# Altium PCB SATELLITE.PcbDoc
Units mil, origin at the board's own origin, x right, y up, seen from the top; angles counter-clockwise.
Board outline 1958.5 x 1958.5 mil, 2 copper layers (Top Layer, Bottom Layer), stack 6.8 mil thick; 39 components, 29 nets, 191 pads, 48 vias.
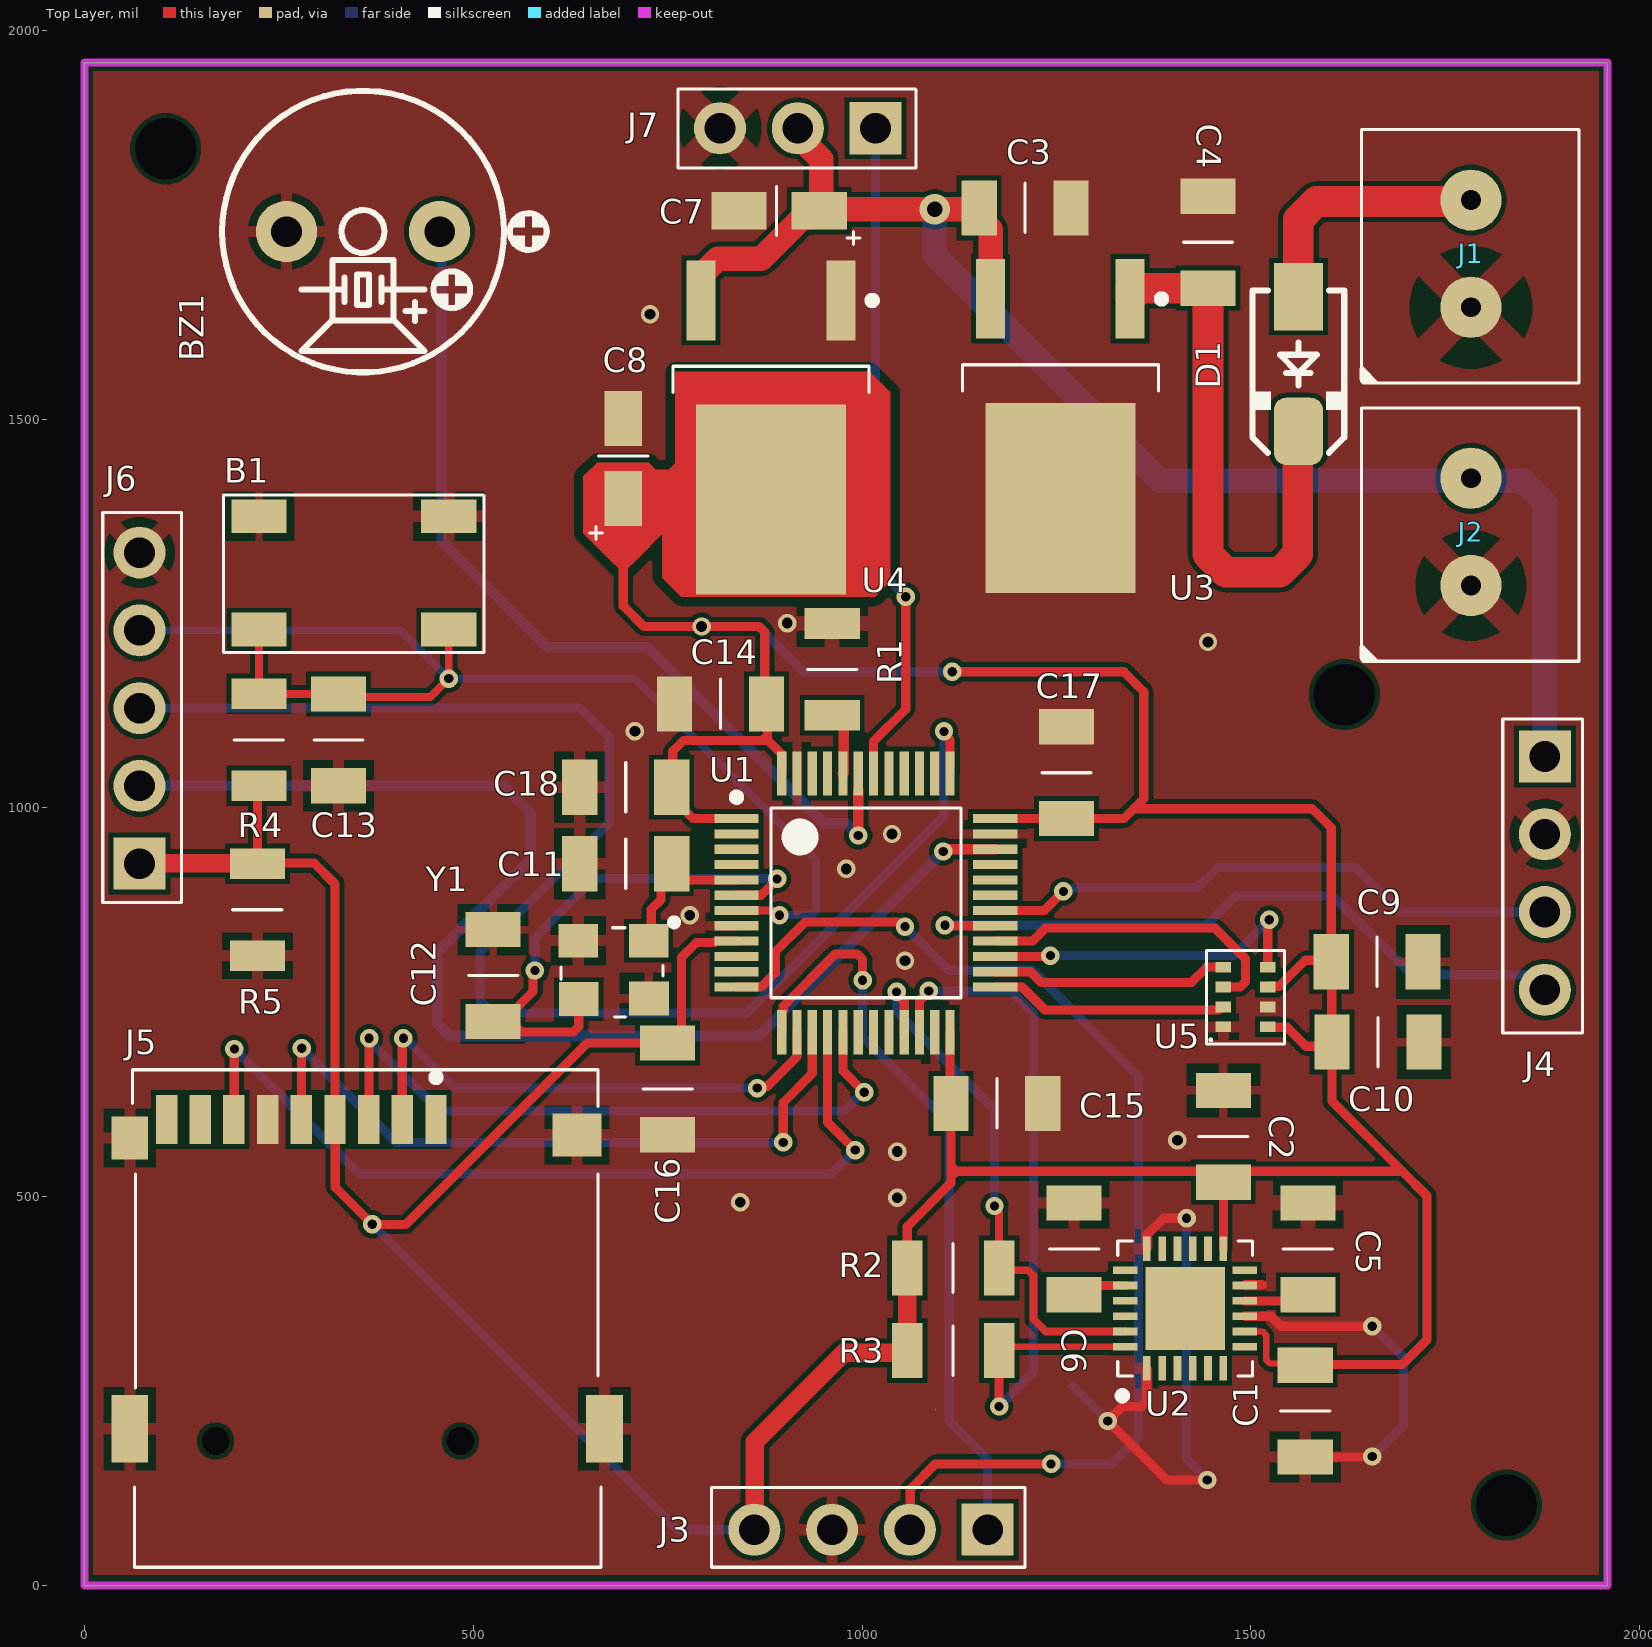
[diagram p0: Top Layer view]
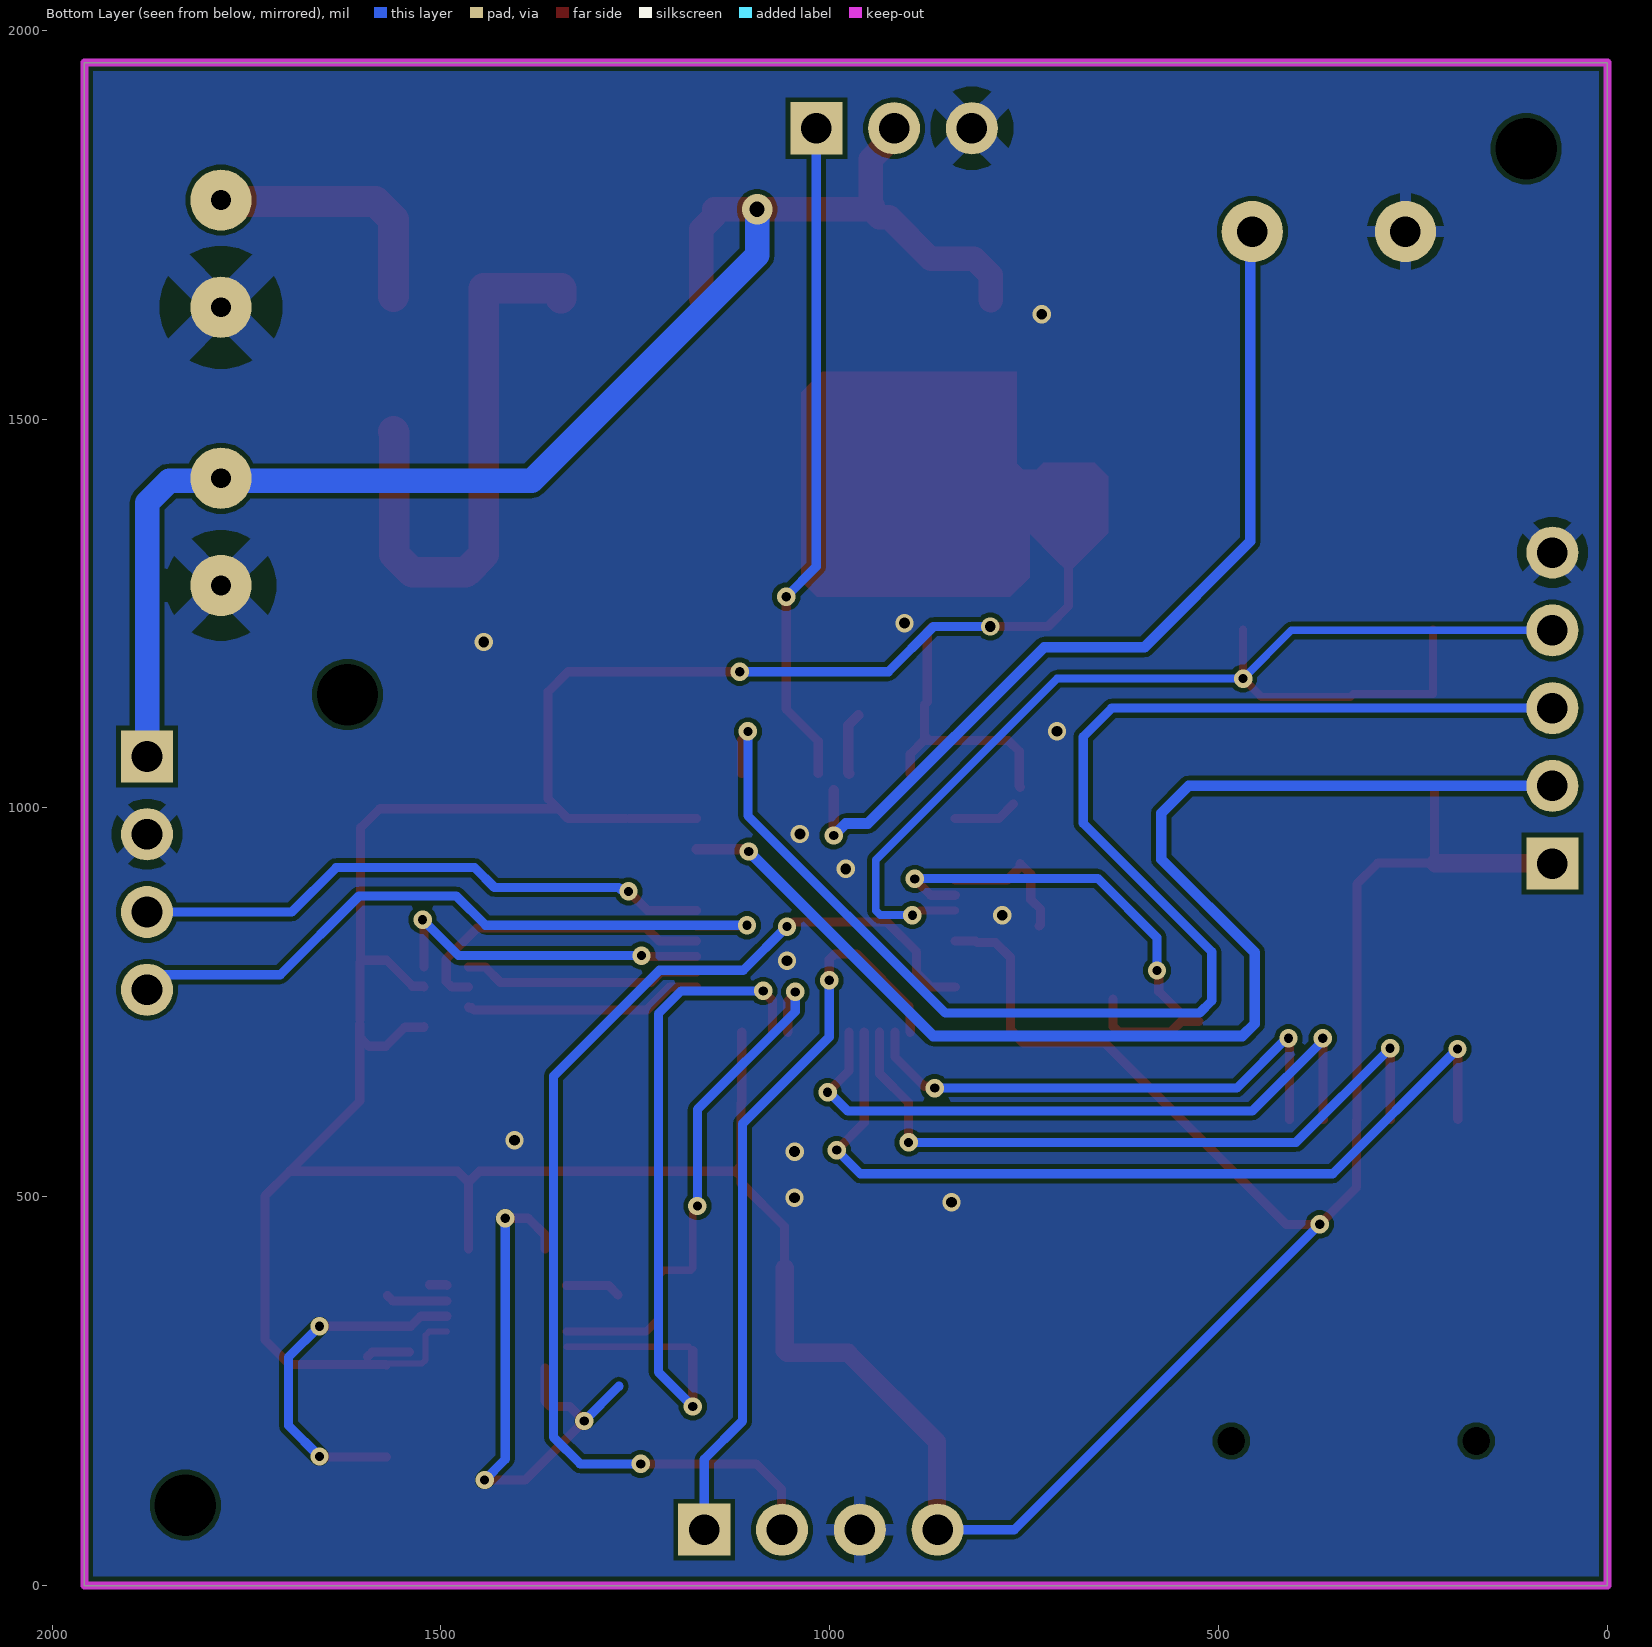
[diagram p1: Bottom Layer view, seen from below]
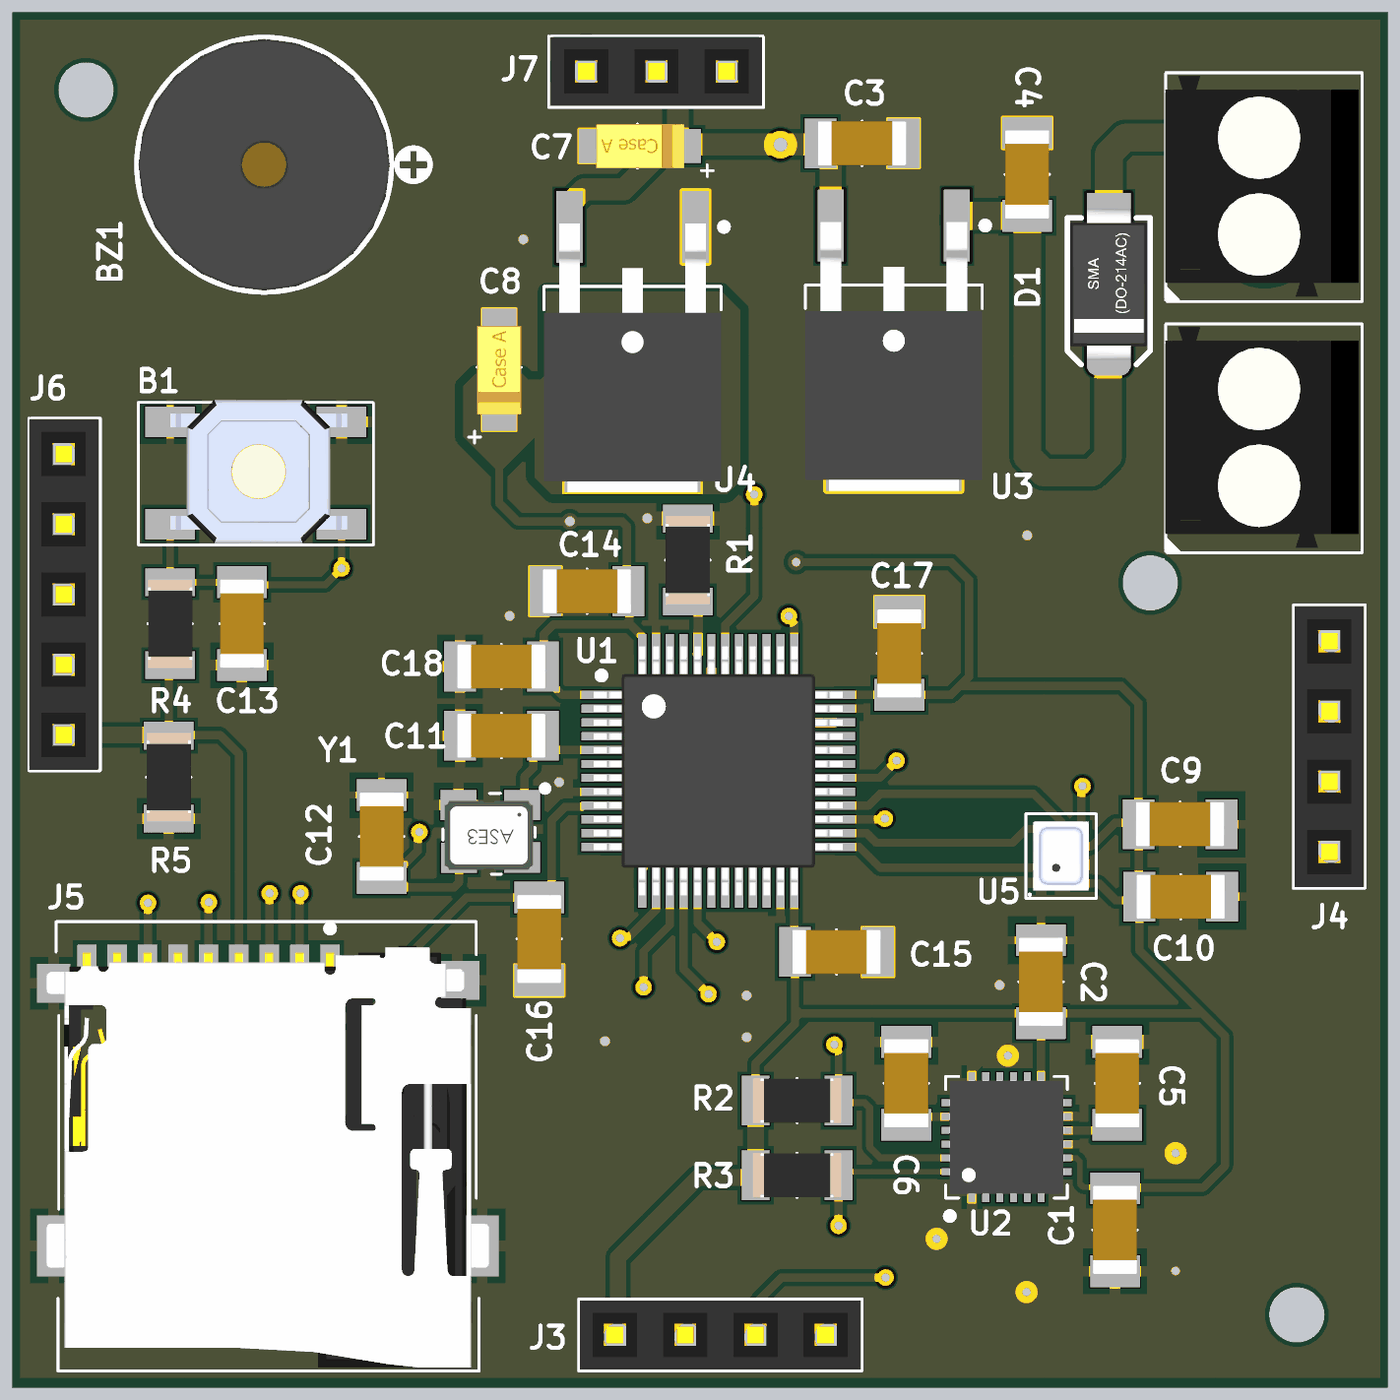
[diagram p2: 3D render of the assembled board from above, using the file's embedded part models]

## Layer stack, top to bottom
Top Solder: solder mask 0.4, Solder Resist, Dk 3.5
Top Layer: signal copper 1.4
Dielectric 1: core 4, Core-011, Dk 4.4
Bottom Layer: signal copper 1.4
Bottom Solder: solder mask 0.4, Solder Resist, Dk 3.5

## Board outline
0,0 0,1958.5 1958.5,1958.5 1958.5,0

## Design rules (kind name [scope] priority, off if disabled: settings)
Clearance Clearance_1 [InNamedPolygon('NONET_L01_P000')] p1: gap=10 ignorepadtopadclearanceinfootprint=TRUE except(0: Arc-Hole Track-Hole SMDPad-Hole THPad-Hole Via-Hole Fill-Hole Poly-Hole Region-Hole Text-Hole)
Clearance [All] p2: gap=11.81 ignorepadtopadclearanceinfootprint=TRUE except(0: Arc-Hole Track-Hole SMDPad-Hole THPad-Hole Via-Hole Fill-Hole Poly-Hole Region-Hole Text-Hole; 5.98: Arc-Track Arc-SMDPad Arc-Poly Track-Track Track-SMDPad Track-Poly SMDPad-SMDPad SMDPad-Poly THPad-Poly Via-Poly Fill-Poly Poly-Poly)
Clearance Clearance_2 [All] p3: gap=10 ignorepadtopadclearanceinfootprint=FALSE except(5.98: Arc-SMDPad Arc-THPad Arc-Via Track-SMDPad Track-THPad Track-Via SMDPad-SMDPad SMDPad-THPad SMDPad-Via THPad-THPad THPad-Via Via-Via)
HoleSize [All] p1: absolutevalues=TRUE maxlimit=122.05 minlimit=1 maxpercent=80.000 minpercent=20.000
MinimumSolderMaskSliver [All] p1: minsoldermaskwidth=3.94
PolygonConnect [All] p1: thpad.connectstyle=Relief thpad.reliefconductorwidth=15 thpad.reliefentries=4 thpad.polygonreliefangle="90 Angle" thpad.airgapwidth=10 smdpad.connectstyle=Relief smdpad.reliefconductorwidth=15 smdpad.reliefentries=4 smdpad.polygonreliefangle="90 Angle" smdpad.airgapwidth=10 via.connectstyle=Direct via.reliefconductorwidth=10 via.reliefentries=2 via.polygonreliefangle="90 Angle" via.airgapwidth=10
RoutingVias [All] p1: holewidth=11.81 width=23.62 viastyle="Through Hole" minholewidth=10 minwidth=19.68 maxholewidth=28 maxwidth=50
SilkToSolderMaskClearance [IsText] p1: minsilkscreentomaskgap=5.98 clearancetoexposedcopper=TRUE
SolderMaskExpansion [All] p1: expansion=4 istentingtop=FALSE
Width [All] p1: maxlimit=78.74 minlimit=5.98 preferedwidth=13.78 minimp=50.000000 maximp=50.000000 favimp=50.000000
27 further rules are at their usual default settings.

## Classes and differential pairs
component class SATELLITE: B1 BZ1 C1 C2 C3 C4 C5 C6 C7 C8 C9 C10 C11 C12 C13 C14 C15 C16 C17 C18 D1 J3 J4 J5 J6 J7 R1 R2 R3 R4 R5 U1 U2 U3 U4 U5 Y1

## Components (designator, comment, footprint, x,y, rotation, side; value= is the part's Value field where it differs from the comment)
B1 "Push Button" "PUSB BUTTON-SMD" 468.5,1229.33 r180 top
BZ1 "BUZZER" BZ_C9 358.27,1741.14 r180 top
C1 "0.1 uF C1206" C1206 1589.57,247.05 r270 top
C2 "0.1 uF C1206" C1206 1444.88,555.12 r90 top
C3 "0.1 uF C1206" C1206 1232.28,1751.97 r180 top
C4 "330 nF C1206" C1206 1425.2,1704.72 r90 top
C5 "0.1 uF C1206" C1206 1592.89,455.71 r270 top
C6 "2.2 nF c1206" C1206 1252.95,410.43 r90 top
C7 "10 uF - Tantal" "C1206- TANTAL" 889.76,1767.72 r180 top
C8 "10 uF - Tantal" "C1206- TANTAL" 692.91,1452.76 r90 top
C9 "0.1 uF C1206" C1206 1639.76,821.85 r0 top
C10 "0.1 uF C1206" C1206 1640.75,718.5 r0 top
C11 "16 pF" C1206 718.75,908.46 r180 top
C12 "16 pF" C1206 505.91,761.81 r90 top
C13 "0.1 uF C1206" C1206 346.46,1110.24 r270 top
C14 "0.1 uF C1206" C1206 795.28,1153.54 r0 top
C15 "0.1 uF C1206" C1206 1195.87,600.39 r180 top
C16 "0.1 uF C1206" C1206 730.31,616.04 r90 top
C17 "0.1 uF C1206" C1206 1282.48,1067.91 r270 top
C18 "0.1 uF C1206" C1206 673.47,1046.26 r0 top
D1 "1N4007" D_SMA 1561.02,1570.87 r270 top
J1 "Klemens 1x2 3.5mm" "KLEMENS 1X2 - 3.5MM" 1780.91,1706.77 r90 top
J2 "Klemens 1x2 3.5mm" "KLEMENS 1X2 - 3.5MM" 1780.91,1349.07 r90 top
J3 "Header 2.54 1x4" "HEADER 2.54 1X4" 1141.73,43.31 r180 top
J4 "Header 2.54 1x4" "HEADER 2.54 1X4" 1906.5,1046.46 r270 top
J5 "Micro SD Card Holder" "MICRO SD CARD HOLDER" 346.46,320.77 r0 top
J6 "Header 2.54 1x5" "HEADER 2.54 1X5" 70.87,928.35 r90 top
J7 "Header 2.54 1x3" "HEADER 2.54 1X3" 1017.32,1873.03 r180 top
R1 "10K R1206" "R1206 RESıSTOR" 961.61,1175.2 r90 top
R2 "4.7K R1206" "R1206 RESıSTOR" 1114.17,408.46 r0 top
R3 "4.7K R1206" "R1206 RESıSTOR" 1114.17,302.17 r0 top
R4 "10K R1206" "R1206 RESıSTOR" 224.41,1090.55 r270 top
R5 "10K R1206" "R1206 RESıSTOR" 222.38,866.14 r90 top
U1 "LQFP48-STM32" LQFP48-STM32 1004.92,877.95 r0 top
U2 "QFN24-MPU6050" QFN50P400X400X90_HS-25N_MPU6050_GYRO 1415.35,356.3 r90 top
U3 "L7805-DPAK" DPAK-L7805-LD108633 1254.92,1491.14 r270 top
U4 "LD108633 DPAK" DPAK-L7805-LD108633 882.87,1489.17 r270 top
U5 "BMP280" ? 1449.41,704.72 r270 top
Y1 "8 MHz 12.5 pf Osc" "8 MHZ OSC." 687.01,810.04 r180 top

## Footprints (in the part's own frame and the unit in brackets; to place one, negate y for a bottom-side part, rotate by r counter-clockwise, add the part's x,y. Pads: shape width x height; smd on the part's side, far side on the other; paste and mask are expansions set on the pad)
"8 MHZ OSC." [mm]
  rect 1.3x1.1 smd mask+0.05: 1(-0.981,-0.49) 2(1.319,-0.49) 3(1.303,1.417) 4(-0.986,1.401)
  silkscreen extent -1.91,-1.19 1.88,2.01, body extent -1.38,-0.64 1.82,1.86, height 1.22
BZ_C9 [mm] "BUZZER 9mm DIA, 7.62mm pitch"
  round 2 hole 1: 1(-2.5,0) 2(2.5,0)
  silkscreen extent -6,-4.6 4.6,4.6, body extent -4.55,-4.55 4.55,4.55, height 5.6
C1206 [mm]
  rect 1.15x1.8 smd mask+0.05: 1(-0.925,-0.5) 2(2.075,-0.5)
  silkscreen extent 0.58,-1.3 0.58,0.31, body extent -1.02,-1.3 2.18,0.3, height 1
"C1206- TANTAL" [mm]
  rect 1.8x1.23 smd mask+0.05: 1(-1.4,0) 1(-1.4,0) 2(1.22,0)
  silkscreen extent -2.74,-0.8 0,1.1, body extent -1.7,-0.8 1.5,0.8, height 1.62
D_SMA [mm] "SMA Molded Diode, 2-Leads, Body 4.3x2.7mm, SOD-128"
  rect 2.2x1.6 smd: 1(-2.2,0)
  rrect50% 2.2x1.6 smd: 2(2.2,0)
  silkscreen extent -2.4,-1.5 2.9,1.5, body extent -2.75,-1.4 2.75,1.4, height 2.6
DPAK-L7805-LD108633 [mm] "L7805 5V Regulator"
  rect 2.6x0.95 smd: 1(-4.15,2.28) 2(-4.15,-2.28)
  rect 6.2x4.9 smd: 3(2.35,0)
  silkscreen extent -4.27,-3.2 -1.15,3.43, body extent -4.27,-3.2 5.45,3.2, height 2.8
"HEADER 2.54 1X3" [mm]
  rect 1.7x1.7 hole 1 mask+0.05: 1(0,-0.025)
  round 1.7 hole 1 mask+0.05: 2(2.54,-0.025) 3(5.08,-0.025)
  silkscreen extent -1.33,-1.3 6.45,1.28, body extent -1.26,-1.27 6.36,1.23, height 9.1
"HEADER 2.54 1X4" [mm]
  rect 1.7x1.7 hole 1 mask+0.05: 1(-0.5,-0.725)
  round 1.7 hole 1 mask+0.05: 2(2.04,-0.725) 3(4.58,-0.725) 4(7.12,-0.725)
  silkscreen extent -1.73,-2.1 8.52,0.5, body extent -1.68,-2.05 8.48,0.45, height 9.1
"HEADER 2.54 1X5" [mm]
  rect 1.7x1.7 hole 1 mask+0.05: 1(0,0)
  round 1.7 hole 1 mask+0.05: 2(2.54,0) 3(5.08,0) 4(7.62,0) 5(10.16,0)
  silkscreen extent -1.28,-1.37 11.48,1.2, body extent -1.25,-1.3 11.45,1.2, height 9.1
"KLEMENS 1X2 - 3.5MM" [mm]
  round 2 hole 0.65: 1(-1.6,-0.05) 2(1.9,-0.05)
  silkscreen extent -4.11,-3.58 4.2,3.58, body extent -3.9,-3.45 4.09,3.55, height 8.9
LQFP48-STM32 [mm] "TSQFP, 48-Leads, Body 7.00x7.00mm, Pitch 0.50mm, IPC Medium Density"
  rect 1.45x0.3 smd mask+0.05: 1(-4.225,2.75) 2(-4.225,2.25) 3(-4.225,1.75) 4(-4.225,1.25) 5(-4.225,0.75) 6(-4.225,0.25) 7(-4.225,-0.25) 8(-4.225,-0.75) 9(-4.225,-1.25) 10(-4.225,-1.75) 11(-4.225,-2.25) 12(-4.225,-2.75) 25(4.225,-2.75) 26(4.225,-2.25) 27(4.225,-1.75) 28(4.225,-1.25) 29(4.225,-0.75) 30(4.225,-0.25) 31(4.225,0.25) 32(4.225,0.75) 33(4.225,1.25) 34(4.225,1.75) 35(4.225,2.25) 36(4.225,2.75)
  rect 0.3x1.45 smd mask+0.05: 13(-2.75,-4.225) 14(-2.25,-4.225) 15(-1.75,-4.225) 16(-1.25,-4.225) 17(-0.75,-4.225) 18(-0.25,-4.225) 19(0.25,-4.225) 20(0.75,-4.225) 21(1.25,-4.225) 22(1.75,-4.225) 23(2.25,-4.225) 24(2.75,-4.225) 37(2.75,4.225) 38(2.25,4.225) 39(1.75,4.225) 40(1.25,4.225) 41(0.75,4.225) 42(0.25,4.225) 43(-0.25,4.225) 44(-0.75,4.225) 45(-1.25,4.225) 46(-1.75,4.225) 47(-2.25,4.225) 48(-2.75,4.225)
  silkscreen extent -4.35,-3.1 3.1,3.57, body extent -4.5,-4.5 4.5,4.5, height 1.6
"MICRO SD CARD HOLDER" [mm]
  rect 0.7x1.6 smd paste+0 mask+0: 1(2.684,7.075) 2(1.584,7.075) 3(0.484,7.075) 4(-0.616,7.075) 5(-1.716,7.075) 6(-2.816,7.075) 7(-3.916,7.075) 8(-5.016,7.075) Cd(-6.116,7.075)
  rect 1.2x1.4 smd paste+0 mask+0: 10(-7.316,6.475)
  rect 1.6x1.4 smd paste+0 mask+0: 11(7.284,6.575)
  rect 1.2x2.2 smd paste+0 mask+0: 12(-7.316,-3.025) 13(8.184,-3.025)
  round 0 hole 0.9 unplated paste-1000 mask+0: ""(-4.516,-3.425) ""(3.484,-3.425)
  silkscreen extent -7.22,-7.55 8.08,8.7, body extent -7.57,-7.42 8.43,7.83, height 1.85
"PUSB BUTTON-SMD" [mm]
  rect 1.8x1.1 smd mask+0.05: 1(0,0) 2(6.2,0) 3(0,-3.7) 4(6.2,-3.7)
  silkscreen extent -1.15,-4.4 7.35,0.75, body extent -0.2,-4.5 6.2,0.7, height 1.5
QFN50P400X400X90_HS-25N_MPU6050_GYRO [mm] "QFN, 24-Leads, Body 4.00x4.00mm, Pitch 0.50mm, Thermal Pad 2.70x2.60mm, IPC Medium Density"
  rect 0.8x0.25 smd mask+0.05: 1(-1.95,1.25) 2(-1.95,0.75) 3(-1.95,0.25) 4(-1.95,-0.25) 5(-1.95,-0.75) 6(-1.95,-1.25) 13(1.95,-1.25) 14(1.95,-0.75) 15(1.95,-0.25) 16(1.95,0.25) 17(1.95,0.75) 18(1.95,1.25)
  rect 0.25x0.8 smd mask+0.05: 7(-1.25,-1.95) 8(-0.75,-1.95) 9(-0.25,-1.95) 10(0.25,-1.95) 11(0.75,-1.95) 12(1.25,-1.95) 19(1.25,1.95) 20(0.75,1.95) 21(0.25,1.95) 22(-0.25,1.95) 23(-0.75,1.95) 24(-1.25,1.95)
  rect 2.7x2.6 smd mask+0.05: 25(0,0)
  silkscreen extent -2.97,-2.2 2.2,2.2, body extent -2.07,-2.07 2.07,2.07, height 0.9
"R1206 RESıSTOR" [mm]
  rect 1x1.8 smd mask+0.05: 1(-1.425,0) 2(1.575,0)
  silkscreen extent 0.08,-0.8 0.08,0.81, body extent -1.52,-0.8 1.68,0.81, height 0.55
? [mm]
  rect 0.35x0.5 smd mask+0.05: 1(-0.35,0.385) 1(-0.35,0.385) 1(-0.35,0.385) 1(-0.35,0.385) 1(-0.35,0.385) 1(-0.35,0.385) 2(-1,0.385) 3(-1.65,0.385) 4(-2.3,0.385) 5(-2.3,1.835) 6(-1.65,1.835) 7(-1,1.835) 8(-0.35,1.835) 8(-0.35,1.835)
  silkscreen extent -2.85,-0.16 0.21,2.38, body extent -2.57,0.11 -0.07,2.11, height 0.95

## Part data
B1: "Smd Push Button", Satın Alma Linki=https://urun.n11.com/diger/mini-pushbutton-switch-smd-P227461537?gclid=Cj0KCQjwkoDmBRCcARIsAG3xzl8Y_-jeD7HocNM6lvuZ_rVp83568XPGtNzlPwXWLph8oCRqo0yh87UaApZYEALw_wcB&gclsrc=aw.ds
BZ1: library part BUZZER_C9, "Buzzer, 9mm, Magnetic Transducer", MANF=Mallory, MANF_P#=PB-09N23P-03Q, PARAM=2.7KHz, PARAM2="3V, 30mA", PRICE=$3
D1: library part DIODE_SMD_1N4007, "DIODE, GENERAL PURPOSE, 1000V/1A", ASSEMBLY=ASSEMBLY, DESC=DESCRIPTION, MANF=Kingtronics, MANF_P#=M7, PARAM="1000V VRRM", PARAM2=1A, PRICE=PRICE
U1: "STM32f101 48 Pins MICROCONTROLLER"
U2: "MPU6050_GYRO"
U3: "L7805 5V REGULATOR SMD Pack_3 Pins"
U4: "SMD,LD108633 DPAK 3.3V REGULATOR"
U5: "Pressure Sensor"

## Free pads (board coordinates)
  round 60 hole 78.74 unplated: ""(104.57,1847.65) ""(1620.08,1145.67) ""(1828.74,103.35)

## Via types
v1: diameter 23.62, hole 11.81, Top Layer to Bottom Layer, 31 vias
v2: diameter 23.62, hole 13.78, Top Layer to Bottom Layer, tented top, 13 vias
v3: diameter 23.62, hole 11.81, Top Layer to Bottom Layer, tented top, 2 vias
v4: diameter 39.37, hole 19.68, Top Layer to Bottom Layer, 1 vias
v5: diameter 23.62/23.62 (per signal layer), hole 11.81, Top Layer to Bottom Layer, 1 vias

## Nets (pads, with @x,y where several pads share a name; then routed paths per layer and width w, separated by ;. In a path a pad name is that pad's centre, name@x,y a point inside that pad or via, vN(x,y) a via of type N, cw(c..) or ccw(c..) an arc to the next point about the centre after c; other vN are vias at no path point)
3V3: C1.1 C2.1 C8.1 C9.1 C10.1 C14.2 C15.2 C16.2 C17.2 C18.2 J3.4 J5.4 J6.1 R2.1 R3.1 R4.2 R5.2 U1.1 U1.9 U1.24 U1.36 U1.48 U2.8 U2.13 U4.3 U5.6 U5.8 | length 6845
  Top Layer w8: U2.8 1515.08,326.77 1519.76,322.09 1519.76,290.12 1524.45,285.43 1567.91,285.43 C1.1
  Top Layer w11.81: J6.1 J6.1@71.51,928.99 ; R5.2@221.54,928.99 R5.2 R5.2@222.57,928.34 ; R4.2 222.57,1026.7 R5.2@222.57,928.34 ; J5.4 322.54,598.98 322.54,512.15 v1@370.08,464.61 ; J5.4@322.23,599.34 322.23,902.23 295.47,928.99 223.22,928.99 R5.2@222.57,928.34 ; v1(370.08,464.57) 370.23,464.42 413.24,464.42 646.55,697.73 C16.2 750.91,697.73 767.64,714.47 767.64,807.57 786.91,826.85 810.6,826.85 812.49,828.74 U1.9 ; C8.1@693.9,1396.65 692.91,1397.64 692.91,1259.84 719.49,1233.27 v2(793.65,1233.27) 867.82,1233.27 874.74,1226.35 874.74,1136.09 878.2,1132.63 878.2,1087.63 ; C18.2 756.47,1027.88 756.47,1072.81 770.2,1086.54 877.1,1086.54 878.2,1087.63 ; C18.2@763.78,1005.17 782.73,986.22 812.49,986.22 U1.1 ; J3.4 J3.4@862.2,72.64 ; U4.3 U4.3@885.83,1399.61 ; U1.48 896.65,1069.17 878.2,1087.63 ; R2.1 1058.07,461.61 1114.17,517.72 1114.17,539.71 ; U1.24 1113.19,621.06 C15.2 1114.17,539.71 ; v3(1115.87,1175.2) 1336.61,1175.2 1362.2,1149.61 1362.2,1011.81 1349.41,999.02 ; U1.36 C17.2@1257.4,986.22 ; C17.2 1336.61,986.22 1349.41,999.02 ; U2.13 C2.1 ; U5.8@1521.65,718.5 1522.15,718.01 1546.45,718.01 1570.9,693.57 1592.89,693.57 C10.1@1601.24,701.91 ; U5.6 1522.64,770.67 1536.42,770.67 1569.91,804.16 1601.35,804.16 C9.1 ; C1.1@1540.35,300.2 1588.58,300.2 C1.1@1594.49,294.29 ; C1.1 1570.87,284.45 1694.88,284.45 1726.38,315.94 1726.38,500.98 1694.57,532.79 ; C10.1@1603.99,727.36 1603.99,801.52 C9.1 ; C10.1@1604.33,721.71 C10.1 1604.33,623.03 1694.57,532.79 ; 1114.17,539.71 1121.09,532.79 1450.48,532.79 C2.1 ; 1349.41,999.02 1578.74,999.02 1603.35,974.41 C9.1 ; C2.1 1478.66,532.79 1694.57,532.79
  Top Layer w23.62: J6.1@71.51,928.99 R5.2@221.54,928.99 ; J3.4@862.2,72.64 862.2,185.04 976.38,299.21 1055.12,299.21 R3.1 R2.1
  Bottom Layer w11.81: v1(370.08,464.57) 762.8,71.85 J3.4 ; v2(793.65,1233.27) 866.6,1233.27 924.68,1175.2 v3(1115.87,1175.2)
5V: C3.2 C7.1 J2.2 J4.1 J7.2 U3.2 U4.2 | length 1963.6
  Top Layer w31.5: U4.2 793.11,1685.04 814.17,1706.1 870.5,1706.1 923.65,1759.25 936.42,1759.25 944.88,1767.72 944.88,1773.71 947.35,1776.18 947.35,1834.4 917.32,1864.43 J7.2 ; C7.1@946.85,1769.68 1088.58,1769.68 1148.62,1769.68 1148.62,1760.83 1165.16,1744.29 U3.2
  Bottom Layer w31.5: v4(1093.5,1769.68) 1093.5,1710.63 1383.47,1420.67 1782.87,1420.67 1849.66,1420.67 1877.95,1392.38 J4.1
9V: C4.1 D1.2 U3.1 | length 747.3
  Top Layer w39.37: U3.1@1345.67,1655.51 1345.67,1668.31 C4.1 1444.88,1325.98 1467.94,1302.92 1536.98,1302.92 1560.04,1325.98 1560.04,1483.27 D1.2
GND: B1.3 B1.4 BZ1.2 C1.2 C2.2 C3.1 C4.2 C5.1 C6.2 C7.2 C8.2 C9.2 C10.2 C11.2 C12.2 C13.2 C14.1 C15.1 C16.1 C17.1 C18.1 J1.1 J2.1 J3.3 J4.2 J5.6 J5.10 J5.11 J5.12 J5.13 J6.5 J7.3 R1.2 R5.1 U1.8 U1.23 U1.35 U1.47 U2.1 U2.9 U2.11 U2.18 U3.3 U4.1 U5.1 U5.7 Y1.2 Y1.4 | length 1230.8
  Top Layer w11.81: U2.1 1366.14,237.21 1359.22,230.29 1334.52,230.29 v1(1315.84,211.61) 1391.63,135.83 v5(1443.9,135.83) ; U2.18 1366.14,450.87 1387.71,472.44 v1(1417.32,472.44) ; U2.9 1525.88,346.46 1538.75,333.58 v1(1656.12,333.58) ; U2.11 1493.11,386.81 1514.6,386.81 ; C1.2 1655.51,165.35 v3(1656.12,165.97)
  Bottom Layer w11.81: 1271.21,256.25 v1(1315.84,211.61) ; v1(1417.32,472.44) 1417.32,162.4 v5(1443.9,135.83) ; v3(1656.12,165.97) 1696.15,205.99 1696.15,293.56 v1(1656.12,333.58)
  other v2: 843.5,493.11 1045.35,498.73 1045.28,558.07 1405.51,572.83 1055.12,803.46 778.34,861.92 979.61,921.57 1038.43,966.54 707.89,1098.66 1444.88,1213.3 903.93,1237.7 727.36,1634.84
NetB1_1: B1.1 B1.2 C13.1 J6.4 R4.1 U1.7 | length 1565.8
  Top Layer w10: B1.2 R4.1 C13.1 330.71,1142.72 444.88,1142.72 v1(468.5,1166.34) B1.1 ; U1.7 884.11,868.11 890.11,862.11 v1(893.79,862.11)
  Bottom Layer w10: J6.4 406.5,1228.35 v1(468.5,1166.34) 707.68,1166.34 940.94,933.07 940.94,868.13 935.09,862.28 893.96,862.28 v1(893.79,862.11)
NetBZ1_1: BZ1.1 U1.43 | length 1149.9
  Top Layer w13.78: v1(995.04,964.53) U1.43@995.06,1022.64
  Bottom Layer w13.78: BZ1.1 459.34,1738.49 459.34,1342.82 595.47,1206.69 724.41,1206.69 951.14,979.97 979.61,979.97 v1(995.04,964.53)
NetC5_2: C5.2 U2.10 | length 79.6
  Top Layer w11.81: U2.10 1561.98,366.14 C5.2@1568.9,373.06
NetC6_1: C6.1 U2.20 | length 70.8
  Top Layer w11.81: C6.1 1284.45,385.83 U2.20
NetC11_1: C11.1 U1.5 Y1.1 | length 185.9
  Top Layer w11.81: Y1.1@730.56,848.02 728.94,849.64 728.94,869.51 741.62,882.19 741.62,914.6 C11.1 755.17,924.21 771.9,907.48 U1.5
NetC12_1: C12.1 U1.6 Y1.3 | length 683
  Top Layer w11.81: C12.1 C12.1@538.39,725.39 ; v1(579.29,790.9) 577.03,788.64 577.03,764.04 C12.1@538.39,725.39 ; Y1.3 635.7,718.91 628.78,711.99 561.63,711.99 548.23,725.39 C12.1@538.39,725.39 ; U1.6 870.16,887.8 890.75,908.38 v1(890.75,908.76)
  Bottom Layer w11.81: v1(579.29,790.9) 579.29,833.22 655.51,909.45 890.06,909.45 v1(890.75,908.76)
NetD1_1: D1.1 J1.2 | length 330.6
  Top Layer w39.37: D1.1 1561.02,1756.66 1584.09,1779.72 J1.2@1782.87,1779.72
NetJ3_1: J3.1 U1.13 | length 967
  Top Layer w11.81: U1.13 896.65,737.71 898.54,739.6 898.54,745.08 965.64,812.18 993.75,812.18 1000.67,805.26 v1(1000.67,778.3)
  Bottom Layer w11.81: v1(1000.67,778.3) 1000.67,705.46 1112.2,593.92 1112.2,211.61 1161.42,162.4 J3.1
NetJ3_2: J3.2 U1.12 | length 1486.9
  Top Layer w11.81: U1.12 870.16,769.68 888.38,787.91 888.38,814.94 926.79,853.35 1046.02,853.35 1051.92,847.44 v1(1055.12,847.44) ; J3.2 1062.01,72.44 1062.01,124.02 1094.49,156.5 v1(1243.11,156.5)
  Bottom Layer w11.81: v1(1055.12,847.44) 1111.22,791.34 1219.07,791.34 1355.32,655.09 1355.32,190.94 1320.87,156.5 v1(1243.11,156.5)
NetJ4_3: J4.3 U1.30 | length 753.2
  Top Layer w11.81: U1.30 1234.25,868.11 v1(1258.86,892.72)
  Bottom Layer w11.81: v1(1258.86,892.72) 1261.12,894.98 1269.02,894.98 1271.68,897.64 1431.1,897.64 1456.69,923.23 1634.84,923.23 1691.93,866.14 J4.3
NetJ4_4: J4.4 U1.29 | length 902
  Top Layer w11.81: v1(1106.55,849.1) 1107.22,848.43 U1.29
  Bottom Layer w11.81: v1(1106.55,849.1) 1442.6,849.1 1480.32,886.81 1605.32,886.81 1706.69,785.43 1858.66,785.43 J4.4
NetJ5_2: J5.2 U1.14 | length 689.7
  Top Layer w11.81: J5.2 408.82,702.42 v1(410.14,703.74) v1@410.14,706.4 ; v1(865.16,639.76) 867.42,642.02 878.33,642.02 916.34,680.04 U1.14
  Bottom Layer w11.81: v1@410.14,706.4 476.78,639.76 v1(865.16,639.76)
NetJ5_3: J5.3 U1.17 | length 874.5
  Top Layer w11.81: J5.3 365.83,599.64 365.83,700.47 v1@366.14,700.79 ; U1.17 975.39,661.85 v1(1002.82,634.42)
  Bottom Layer w11.81: v1@366.14,700.79 456.69,610.24 976.89,610.24 1001.08,634.42 v1(1002.82,634.42)
  other v1: 366.14,703.74
NetJ5_5: J5.5 U1.15 | length 921.3
  Top Layer w11.81: J5.5 279.21,599.64 279.21,690.63 v1(279.53,690.94) ; v1@901.57,569.88 v1(898.62,569.88) 898.62,621.06 936.02,658.46 U1.15
  Bottom Layer w11.81: v1(279.53,690.94) 400.59,569.88 v1(898.62,569.88)
NetJ5_7: J5.7 U1.16 | length 1134.5
  Top Layer w11.81: J5.7 192.6,599.64 192.6,689.65 v1(192.91,689.96) ; U1.16 955.71,595.47 v1(991.14,560.04)
  Bottom Layer w11.81: v1(192.91,689.96) 353.35,529.53 960.63,529.53 v1(991.14,560.04)
NetJ6_2: J6.2 U1.34 | length 1661.5
  Top Layer w13.78: v1(1104.33,943.9) 1106.99,943.9 1109.95,946.85 U1.34
  Bottom Layer w13.78: J6.2 538.58,1028.35 573.82,993.11 573.82,934.06 453.74,813.98 453.74,722.44 469.49,706.69 867.13,706.69 v1(1104.33,943.9)
NetJ6_3: J6.3 U1.37 | length 1900.5
  Top Layer w11.81: v1(1105.32,1098.43) 1105.32,1095.23 1113.19,1087.36 U1.37
  Bottom Layer w11.81: J6.3 637.4,1128.35 674.21,1091.54 674.21,980.32 508.86,814.96 508.86,752 524.64,736.22 851.42,736.22 1105.32,990.12 v1(1105.32,1098.43)
NetJ7_1: J7.1 U1.42 | length 862.9
  Top Layer w11.81: U1.42 1014.76,1085.63 1056.1,1126.97 v1(1056.1,1271.65)
  Bottom Layer w11.81: J7.1 1017.32,1310.43 v1(1056.1,1271.65)
NetR1_1: R1.1 U1.44 | length 80.5
  Top Layer w13.78: R1.1@963.58,1119.09 976.38,1106.3 976.38,1078.25 976.3,1078.17 976.3,1045.2 U1.44
NetR2_2: R2.2 U1.21 U2.23 | length 694.5
  Top Layer w10: v1(1170.28,488.19) 1170.28,484.99 1176.18,479.09 R2.2 1179.13,405.51 1213.55,405.51 1220.47,398.59 1220.47,342.52 1236.22,326.77 U2.23
  Top Layer w11.81: v1(1044.4,763.43) 1044.4,760.79 1054.13,751.06 U1.21
  Bottom Layer w11.81: v1(1044.4,763.43) 1044.4,738.08 1170.28,612.2 v1(1170.28,488.19)
NetR3_2: R3.2 U1.22 U2.24 | length 964.7
  Top Layer w8: R3.2 1181.1,307.09 U2.24
  Top Layer w11.81: U1.22 1073.82,752.39 1085.63,764.2 v1(1085.63,764.76) ; v1(1176.18,230.29) 1176.18,287.67 R3.2
  Bottom Layer w11.81: v1(1085.63,764.76) 1190.94,764.76 1220.47,735.24 1220.47,274.59 v1(1176.18,230.29)
NetU1_25: U1.25 U5.2 | length 307.2
  Top Layer w11.81: U1.25 1205.71,769.68 1235.24,740.16 1457.68,740.16 1460.63,743.11 1463.58,743.11 U5.2
NetU1_26: U1.26 U5.4 | length 307.2
  Top Layer w11.81: U1.26 1216.54,789.37 1230.32,775.59 1423.48,775.59 1443.16,795.28 U5.4
NetU1_27: U1.27 U5.5 | length 433.8
  Top Layer w11.81: U1.27 1241.14,809.06 v1(1242.13,810.04) ; U5.5 1521.65,854.33 v1(1523.62,856.3)
  Bottom Layer w11.81: v1(1242.13,810.04) 1477.36,810.04 v1(1523.62,856.3)
NetU1_28: U1.28 U5.3 | length 406
  Top Layer w11.81: U1.28 1219.07,828.74 1235.8,845.47 1453.74,845.47 1493.11,806.1 1493.11,776.6 1486.19,769.68 U5.3
pads on no net: J5. J5.1 J5.8 J5.Cd U1.2 U1.3 U1.4 U1.10 U1.11 U1.18 U1.19 U1.20 U1.31 U1.32 U1.33 U1.38 U1.39 U1.40 U1.41 U1.45 U1.46 U2.2 U2.3 U2.4 U2.5 U2.6 U2.7 U2.12 U2.14 U2.15 U2.16 U2.17 U2.19 U2.21 U2.22 U2.25

## Polygon pours and split planes (outlines as drawn)
GND on Bottom Layer "GND_L02_P000" (solid, pour order 0): 1960.55,1958.66 1960.55,11.97 2.05,11.97 2.05,1958.66
GND on Top Layer "GND_L01_P008" (solid, remove dead copper, pour order 8): -1.97,1972.44 1956.69,1972.44 1956.69,13.78 -1.97,13.78

## Keep-outs
Keep-Out Layer:
  the board outline again, w10

## Other copper
Top Layer:
  region net 3V3: 734.25,1435.04 767.72,1435.04 758.86,1426.18 726.38,1426.18
  region net 3V3: 743.11,1426.18 759.84,1442.91 759.84,1561.02 1009.84,1561.02 1036.41,1534.45 1036.42,1291.34 1016.73,1271.65 767.72,1271.65 743.11,1296.26 743.11,1352.36
  region net 3V3: 673.23,1321.85 692.91,1302.17 712.6,1321.85
  region net 3V3: 641.73,1426.18 641.73,1353.35 673.23,1321.85 712.6,1321.85 743.11,1352.36 743.11,1426.18 725.39,1443.9 659.45,1443.9
  region net 3V3: 877.1,1086.54 878.2,1087.63 878.2,1100.64 869.09,1091.54
  region net 3V3: 1128.94,532.48 1114.17,517.72 1114.17,532.48

## Silkscreen, mask and mechanical layers (free items; w line width, h text height)
Top Overlay:
  region: 1094.64,226.28 1094.81,226.28 1094.81,226.11 1094.47,226.11 1094.47,226.28 1094.47,226.44 1094.64,226.44